# EAGLE board hades_mk1_esc_board (EAGLE 9.6.2)
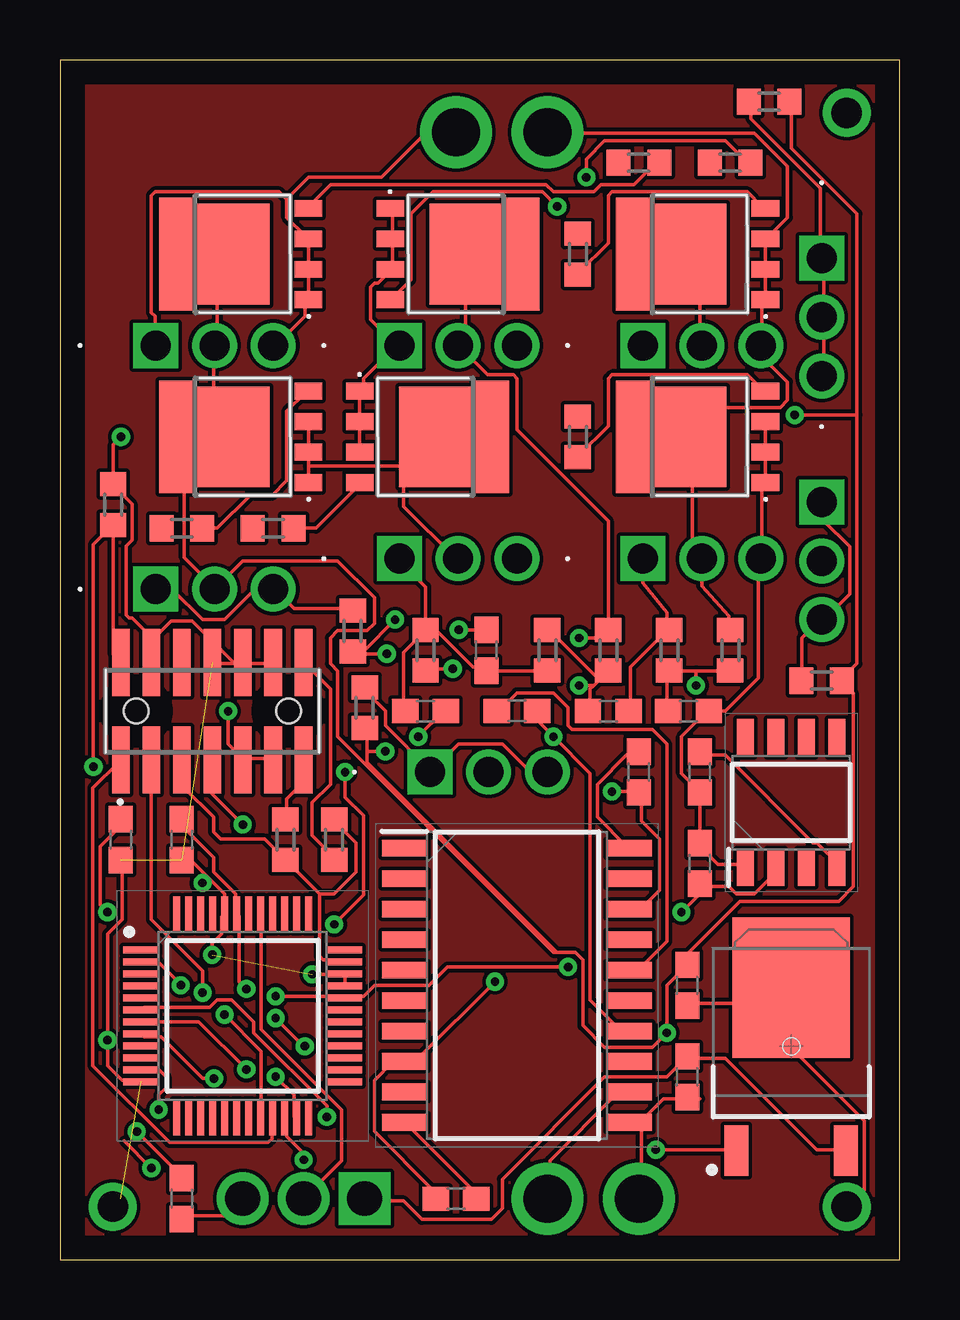
[diagram p0: board, top side]
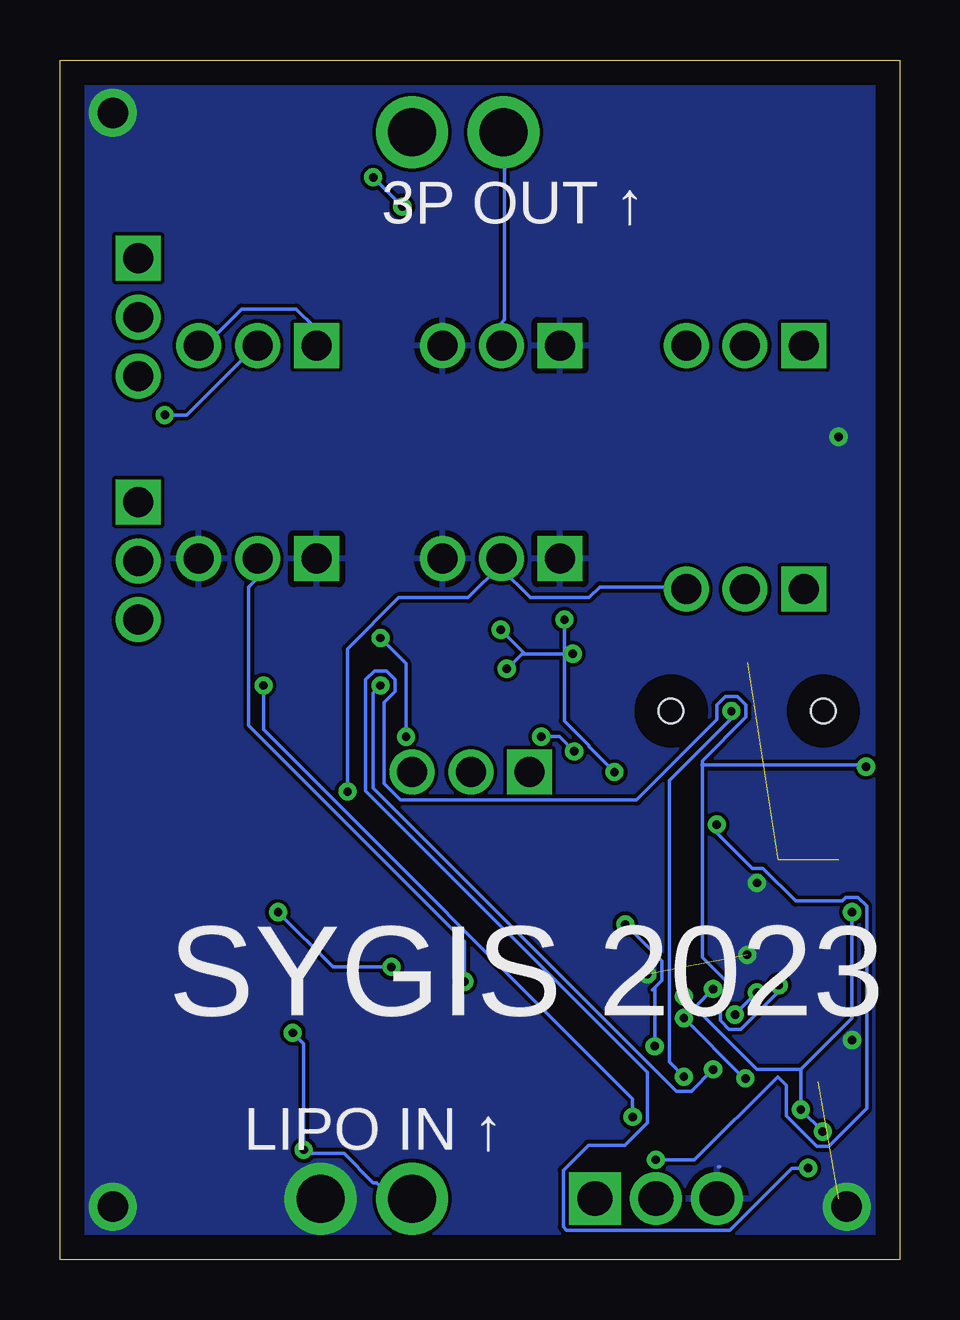
[diagram p1: board, bottom side, seen from below]

Size 35 x 50 mm. Coordinates in mm from the lower left corner, seen from the top.
Outline: 0,0 35,0 35,50 0,50 0,0
Copper layers (1*16): Top 0.035mm / dielectric 1.5mm / Bottom 0.035mm
Design rules "default": minimum track width 6mil, minimum drill 0.35mm, track to track 6mil, track to pad 6mil, pad to pad 6mil, via to via 6mil, smd to smd 6mil, copper to edge 40mil, drill to drill 6mil, minimum pad ring 10mil, minimum via ring 8mil, stop-mask expansion 4mil, vias tented up to drill 0mil, thermal gap 10mil
tKeepout: area 0,0 to 0.4,50; area 0,0 to 35,0.5; area 34.5,0 to 35,50; area 0,49.5 to 35,50
bKeepout: area 0,0 to 0.4,50; area 0,0 to 35,0.5; area 34.5,0 to 35,50; area 0,49.5 to 35,50

## Footprints (pad centres in the part's own frame; a part is rotated, then mirrored left to right if it is on the bottom)
HTR20L120CT = drill 1.25 pad 1.875 square: 1 0,0 | drill 1.25 pad 1.875: 2 4.9,0; 3 2.45,0
C0603 = smd 1.1 x 1: 1 -0.85,0; 2 0.85,0
QFP50P900X900X160-48N = smd 1.475 x 0.3: 1 -4.238,2.75; 2 -4.238,2.25; 3 -4.238,1.75; 4 -4.238,1.25; 5 -4.238,0.75; 6 -4.238,0.25; 7 -4.238,-0.25; 8 -4.238,-0.75; 9 -4.238,-1.25; 10 -4.238,-1.75; 11 -4.238,-2.25; 12 -4.238,-2.75; 25 4.238,-2.75; 26 4.238,-2.25; 27 4.238,-1.75; 28 4.238,-1.25; 29 4.238,-0.75; 30 4.238,-0.25; 31 4.238,0.25; 32 4.238,0.75; 33 4.238,1.25; 34 4.238,1.75; 35 4.238,2.25; 36 4.238,2.75 | smd 0.3 x 1.475: 13 -2.75,-4.238; 14 -2.25,-4.238; 15 -1.75,-4.238; 16 -1.25,-4.238; 17 -0.75,-4.238; 18 -0.25,-4.238; 19 0.25,-4.238; 20 0.75,-4.238; 21 1.25,-4.238; 22 1.75,-4.238; 23 2.25,-4.238; 24 2.75,-4.238; 37 2.75,4.238; 38 2.25,4.238; 39 1.75,4.238; 40 1.25,4.238; 41 0.75,4.238; 42 0.25,4.238; 43 -0.25,4.238; 44 -0.75,4.238; 45 -1.25,4.238; 46 -1.75,4.238; 47 -2.25,4.238; 48 -2.75,4.238
SOIC127P600X175-8N = smd 1.525 x 0.7: 1 -2.712,1.905; 2 -2.712,0.635; 3 -2.712,-0.635; 4 -2.712,-1.905; 5 2.712,-1.905; 6 2.712,-0.635; 7 2.712,0.635; 8 2.712,1.905
TO228P972X240-3N = smd 2.1 x 1: 1 -4.35,2.28; 3 -4.35,-2.28 | smd 5.85 x 4.9: 4 2.45,0
SOIC127P1032X265-20N = smd 1.875 x 0.7: 1 -4.688,5.715; 2 -4.688,4.445; 3 -4.688,3.175; 4 -4.688,1.905; 5 -4.688,0.635; 6 -4.688,-0.635; 7 -4.688,-1.905; 8 -4.688,-3.175; 9 -4.688,-4.445; 10 -4.688,-5.715; 11 4.688,-5.715; 12 4.688,-4.445; 13 4.688,-3.175; 14 4.688,-1.905; 15 4.688,-0.635; 16 4.688,0.635; 17 4.688,1.905; 18 4.688,3.175; 19 4.688,4.445; 20 4.688,5.715
SHDRRA3W87P0X254_1X3_747X818X6 = drill 1.45 pad 2.175 square: 1 0,0 | drill 1.45 pad 2.175: 2 2.54,0; 3 5.08,0
FTSH-107-XX-YYY-DV-K-A = smd 0.74 x 2.79: 1 -3.81,-2.035; 2 -3.81,2.035; 3 -2.54,-2.035; 4 -2.54,2.035; 5 -1.27,-2.035; 6 -1.27,2.035; 7 0,-2.035; 8 0,2.035; 9 1.27,-2.035; 10 1.27,2.035; 11 2.54,-2.035; 12 2.54,2.035; 13 3.81,-2.035; 14 3.81,2.035 | hole 1.02: -3.175,0; 3.175,0
PSMN028100YS115 = smd 0.7 x 1.15: 1 -1.905,-2.737; 2 -0.635,-2.737; 3 0.635,-2.737; 4 1.905,-2.737 | smd 4.2 x 3.1: 5 0,0.437 | smd 4.7 x 1.5: 6 0,2.737
R0603 = smd 1 x 1.1: 1 -0.85,0; 2 0.85,0

## Placement (x,y rotation side)
BR1  HTR20L120CT  [HTR20L120CT]  15.42,20.32 0 top
BR2  HTR20L120CT  [HTR20L120CT]  31.75,31.57 270 top
BR4  HTR20L120CT  [HTR20L120CT]  31.75,41.73 270 top
BR5  HTR20L120CT  [HTR20L120CT]  3.99,27.94 0 top
BR6  HTR20L120CT  [HTR20L120CT]  14.15,29.21 0 top
BR7  HTR20L120CT  [HTR20L120CT]  14.15,38.1 0 top
BR8  HTR20L120CT  [HTR20L120CT]  3.99,38.1 0 top
BR9  HTR20L120CT  [HTR20L120CT]  24.31,38.1 0 top
BR10  HTR20L120CT  [HTR20L120CT]  24.31,29.21 0 top
C1  10uF  [C0603]  26.67,20.32 90 top
C2  10uF  [C0603]  26.67,16.51 90 top
C3  2.2uF  [C0603]  2.54,17.5 270 top
C4  2.2uF  [C0603]  5.08,17.5 270 top
C5  2.2uF  [C0603]  5.08,2.54 270 top
C6  0.1uF  [C0603]  24.13,20.32 90 top
C7  0.1uF  [C0603]  19.05,22.86 0 top
C8  0.1uF  [C0603]  16.51,2.54 0 top
C9  100uF  [C0603]  17.78,25.4 90 top
C10  100uF  [C0603]  22.86,22.86 180 top
C11  100uF  [C0603]  26.2,22.86 180 top
C12  0.1uF  [C0603]  26.15,11.43 90 top
C13  22uF  [C0603]  26.15,7.62 90 top
C14  0.1uF  [C0603]  15.24,22.86 180 top
IC1  TMS320F28027PTS  [QFP50P900X900X160-48N]  7.62,10.16 0 top
IC2  MC33269D-3.3G  [SOIC127P600X175-8N]  30.48,19.05 90 top
IC3  L4941BDT-TR  [TO228P972X240-3N]  30.48,8.89 90 top
IC4  FAN7388MX  [SOIC127P1032X265-20N]  19.05,11.43 0 top
J1  22-05-3031  [SHDRRA3W87P0X254_1X3_747X818X6]  12.7,2.54 180 top
J2  FTSH-107-01-L-DV-K-A  [FTSH-107-XX-YYY-DV-K-A]  6.35,22.86 0 top
Q1  PSMN038-100YLX  [PSMN028100YS115]  7.62,34.29 90 top
Q2  PSMN038-100YLX  [PSMN028100YS115]  15.24,34.29 270 top
Q3  PSMN038-100YLX  [PSMN028100YS115]  7.62,41.91 90 top
Q4  PSMN038-100YLX  [PSMN028100YS115]  16.51,41.91 270 top
Q5  PSMN038-100YLX  [PSMN028100YS115]  26.67,41.91 90 top
Q6  PSMN038-100YLX  [PSMN028100YS115]  26.67,34.29 90 top
R1  2.2  [R0603]  5.08,30.48 180 top
R2  2.2  [R0603]  8.89,30.48 180 top
R3  2.2  [R0603]  24.13,45.72 180 top
R4  2.2  [R0603]  27.94,45.72 180 top
R5  2.2  [R0603]  21.59,41.91 90 top
R6  2.2  [R0603]  21.59,34.29 90 top
R7  2.2  [R0603]  12.7,23 90 top
R8  2.2  [R0603]  31.75,24.13 180 top
R9  2.2  [R0603]  29.56,48.26 180 top
R13  100k  [R0603]  15.24,25.4 270 top
R14  330k  [R0603]  12.2,26.2 90 top
R15  100k  [R0603]  20.32,25.4 90 top
R16  330k  [R0603]  22.86,25.4 90 top
R17  100k  [R0603]  25.4,25.4 270 top
R18  330k  [R0603]  27.94,25.4 90 top
R19  2.2k  [R0603]  2.22,31.47 270 top
R20  4.7k  [R0603]  9.4,17.5 90 top
R21  4.7k  [R0603]  11.43,17.5 270 top

## Library data of the parts
BR1 BR2 BR4-BR10 = SamacSys_Parts; DESCRIPTION: SCHOTTKY RECT, DUAL, 120V, 20A, TO-220AB; HEIGHT: 20mm; MANUFACTURER_NAME: MULTICOMP; MANUFACTURER_PART_NUMBER: HTR20L120CT
C1-C14 = rcl; SPICEPREFIX: C
IC1 = SamacSys_Parts; ARROW_PART_NUMBER: TMS320F28027PTS; ARROW_PRICE-STOCK: https://www.arrow.com/en/products/tms320f28027pts/texas-instruments?region=nac; DESCRIPTION: Piccolo 32-bit MCU with 60 MHz, 64 KB Flash; HEIGHT: 1.6mm; MANUFACTURER_NAME: Texas Instruments; MANUFACTURER_PART_NUMBER: TMS320F28027PTS; MOUSER_PART_NUMBER: 595-TMS320F28027PTS; MOUSER_PRICE-STOCK: https://www.mouser.co.uk/ProductDetail/Texas-Instruments/TMS320F28027PTS?qs=AFkNxQkJKAJP3ZJleH7SMA%3D%3D
IC2 = SamacSys_Parts; ARROW_PART_NUMBER: MC33269D-3.3G; ARROW_PRICE-STOCK: https://www.arrow.com/en/products/mc33269d-3.3g/on-semiconductor?region=europe; DESCRIPTION: Voltage regulator,MC33269D3.3 MC33269D-3.3G, Low Dropout Voltage Regulator, 0.8A 3.3 V, +/-1%, 8-Pin, SOIC; HEIGHT: 1.75mm; MANUFACTURER_NAME: onsemi; MANUFACTURER_PART_NUMBER: MC33269D-3.3G; MOUSER_PART_NUMBER: 863-MC33269D-3.3G; MOUSER_PRICE-STOCK: https://www.mouser.co.uk/ProductDetail/onsemi/MC33269D-33G?qs=dFKnUM%2FquJZ%252BBcrN2hd5Yg%3D%3D
IC3 = SamacSys_Parts; ARROW_PART_NUMBER: L4941BDT-TR; ARROW_PRICE-STOCK: https://www.arrow.com/en/products/l4941bdt-tr/stmicroelectronics?region=nac; DESCRIPTION: L4941BDT-TR, Low Dropout Voltage Regulator, 1A, 5 V +/-4%, 3-Pin DPAK; HEIGHT: 2.4mm; MANUFACTURER_NAME: STMicroelectronics; MANUFACTURER_PART_NUMBER: L4941BDT-TR; MOUSER_PART_NUMBER: 511-L4941BDT-TR; MOUSER_PRICE-STOCK: https://www.mouser.co.uk/ProductDetail/STMicroelectronics/L4941BDT-TR?qs=tPFdqECvbMIySYN92F2N4Q%3D%3D
IC4 = SamacSys_Parts; ARROW_PART_NUMBER: FAN7388MX; ARROW_PRICE-STOCK: https://www.arrow.com/en/products/fan7388mx/on-semiconductor; DESCRIPTION: IC, Fairchild, FAN7388MX Fairchild Semiconductor FAN7388MX, Triple MOSFET Power Driver 350 mA, 650 mA Half Bridge, 10 20 V, Inverting; HEIGHT: 2.65mm; MANUFACTURER_NAME: onsemi; MANUFACTURER_PART_NUMBER: FAN7388MX; MOUSER_PART_NUMBER: 512-FAN7388MX; MOUSER_PRICE-STOCK: https://www.mouser.com/Search/Refine.aspx?Keyword=512-FAN7388MX
J1 = SamacSys_Parts; DESCRIPTION: 2.54mm,header,KK,90,Sn,frictn lock,3w Molex KK 254 Series, Series Number 7478, 2.54mm Pitch 3 Way 1 Row Right Angle PCB Header, Through Hole; HEIGHT: 6.6mm; MANUFACTURER_NAME: Molex; MANUFACTURER_PART_NUMBER: 22-05-3031; MOUSER_PART_NUMBER: 538-22-05-3031; MOUSER_PRICE-STOCK: https://www.mouser.co.uk/ProductDetail/Molex/22-05-3031?qs=wUVoC1r15A8R6yfh%252BPzUyQ%3D%3D
J2 = SamacSys_Parts; ARROW_PART_NUMBER: FTSH-107-01-L-DV-K-A; ARROW_PRICE-STOCK: https://www.arrow.com/en/products/ftsh-107-01-l-dv-k-a/samtec?region=nac; DESCRIPTION: 14 position, High Reliability Header Strips, 0.050&quot; pitch, Dual-Row Vertical; HEIGHT: mm; MANUFACTURER_NAME: SAMTEC; MANUFACTURER_PART_NUMBER: FTSH-107-01-L-DV-K-A; MOUSER_PART_NUMBER: 200-FTSH10701LDVKA; MOUSER_PRICE-STOCK: https://www.mouser.co.uk/ProductDetail/Samtec/FTSH-107-01-L-DV-K-A?qs=PB6%2FjmICvI3xEHFou4PhNg%3D%3D
Q1-Q6 = SamacSys_Parts; ARROW_PART_NUMBER: PSMN038-100YLX; ARROW_PRICE-STOCK: https://www.arrow.com/en/products/psmn038-100ylx/nexperia?region=nac; DESCRIPTION: MOSFET N-channel 100 V 37.5 mo FET; HEIGHT: 1.2mm; MANUFACTURER_NAME: Nexperia; MANUFACTURER_PART_NUMBER: PSMN038-100YLX; MOUSER_PART_NUMBER: 771-PSMN038100YLX; MOUSER_PRICE-STOCK: https://www.mouser.co.uk/ProductDetail/Nexperia/PSMN038-100YLX?qs=fi7yB2oewZmlCDCybeIKqQ%3D%3D
R1-R9 R13-R21 = rcl; SPICEPREFIX: R

## Nets
5V_OUT: C13.2 IC3.3 J1.1
+3V3: C2.1 C3.1 C4.1 C5.1 IC1.11 IC1.32 IC1.43 IC2.2
EMF_1: C9.2 IC1.8 R13.2 R14.1
EMF_2: C10.2 IC1.7 R15.2 R16.1
EMF_3: C11.2 IC1.6 R17.2 R18.1
G_1: IC4.19
G_2: IC4.17
G_3: IC4.15
G_4: IC4.13
G_5: IC4.9
G_6: IC4.7
GND: BR6.1 BR6.2 BR7.1 BR7.2 BR10.1 BR10.2 C1.1 C2.2 C3.2 C4.2 C5.2 C9.1 C10.1 C11.1 C12.1 C13.1 C14.2 IC1.12 IC1.33 IC1.34 IC1.44 IC2.1 IC3.4 IC4.11 J1.3 J2.4 J2.8 J2.10 J2.12 Q2.1 Q2.2 Q2.3 Q4.1 Q4.2 Q4.3 Q6.1 Q6.2 Q6.3 R13.1 R15.1 R17.1 R19.1
N$1: J2.14 R21.2
N$2: C1.2 IC2.4
N$3: J2.13 R20.2
N$4: IC4.1
N$5: IC4.2
N$6: IC4.3
N$7: IC4.4
N$8: IC4.5
N$9: IC4.6
N$10: Q1.4 R1.1
N$11: Q2.4 R2.1
N$12: Q3.4 R3.1
N$13: Q4.4 R4.1
N$14: Q5.4 R5.1
N$15: Q6.4 R6.1
N$16: R1.2
N$17: R2.2
N$18: R3.2
N$19: R4.2
N$20: R5.2
N$21: R6.2
N$28: BR2.1 BR2.2 R8.2
N$29: BR2.3
N$30: BR4.1 BR4.2 BR4.3 R9.2
N$32: BR1.1 BR1.2 R7.2
N$33: BR1.3
PH_1: IC1.29
PH_2: IC1.37
PH_3: IC1.39
PL_1: IC1.28
PL_2: IC1.38
PL_3: IC1.40
SIG_IN: IC1.41 J1.2
TCK: IC1.23 J2.9 J2.11
TDI: IC1.20 J2.3
TDO: IC1.22 J2.7
TMS: IC1.21 J2.1
TRST: IC1.2 J2.2 R19.2
VCC: BR5.3 BR8.3 BR9.3 C12.2 C14.1 IC3.1 IC4.12 Q1.5 Q1.6 Q3.5 Q3.6 Q5.5 Q5.6 R7.1 R8.1 R9.1
VCC_C1: C6.2 IC4.20
VCC_C2: C7.1 IC4.16
VCC_C3: C8.2 IC4.10
VDDIO_S: IC1.35 J2.5 R20.1 R21.1
VS1: BR5.1 BR5.2 BR6.3 C6.1 IC4.18 Q1.1 Q1.2 Q1.3 Q2.5 Q2.6 R14.2
VS2: BR7.3 BR8.1 BR8.2 C7.2 IC4.14 Q3.1 Q3.2 Q3.3 Q4.5 Q4.6 R16.2
VS3: BR9.1 BR9.2 BR10.3 C8.1 IC4.8 Q5.1 Q5.2 Q5.3 Q6.5 Q6.6 R18.2

## Tracks (layer width: path | path; a pad name or v marks a point on that pad's centre or on a via)
5V_OUT
  Top 0.152: IC3.3 32.61,4.57 31.55,4.57 27.74,8.38 26.21,8.38 C13.2 26.06,8.38 25.3,7.62 22.71,7.62 18.44,3.35 18.44,2.13 17.98,1.68 15.09,1.68 14.33,2.44 12.8,2.44 J1.1
+3.3V
  pour Top: 0,49.53 0,0 35,0 35,50 0,50
+3V3  (via drill 0.35)
  Top 0.152: C4.1 5.18,18.29 5.18,17.98 6.4,16.76 6.4,16.15 7.32,15.24 7.32,14.48 IC1.43 7.47,14.33 7.47,11.58 v7.77,11.28 | 26.67,15.54 27.89,15.54 28.19,15.24 28.96,15.24 29.72,16 29.72,16.31 IC2.2 | v3.2,5.33 5.03,3.5 C5.1 | v4.12,6.25 4.12,6.86 4.42,7.16 4.42,7.62 4.12,7.92 3.5,7.92 IC1.11 | v1.98,14.48 1.68,14.78 1.68,17.22 2.44,17.98 2.44,18.29 C3.1 | v8.99,10.97 11.73,10.97 IC1.32 11.89,10.97 12.65,10.97 13.11,11.43 15.39,11.43 16.15,12.19 v21.18,12.19 | 26.67,15.54 26.67,15.24 v25.91,14.48 | 26.67,15.54 C2.1
  Bottom 0.152: v3.2,5.33 v4.12,6.25 4.12,7.92 | v1.98,14.48 1.98,10.06 4.12,7.92 | 8.53,10.52 5.94,7.92 4.12,7.92 | 8.53,10.52 v8.99,10.97 | v25.91,14.48 23.62,12.19 v21.18,12.19 | 8.53,10.52 v7.77,11.28
EMF_1  (via drill 0.35)
  Top 0.152: v13.62,25.25 12.25,25.25 R14.1 | v16.38,24.62 15.25,24.62 R13.2 | v16.62,26.25 C9.2 | R14.1 12.16,25.35 12.11,25.31 | R14.1 12.65,25.35 v13.97,26.67 | v11.88,20.32 11.88,19.27 12.65,18.5 12.65,15.19 v11.43,13.97 | v10.21,8.89 10.16,8.89 8.89,10.16 v8.99,10.06 | IC1.8 3.5,9.29 4.21,9.29 5.96,7.55 v6.42,7.55
  Bottom 0.152: 15.62,25.25 15.75,25.25 v16.38,24.62 | 15.62,25.25 v13.62,25.25 | 15.62,25.25 v16.62,26.25 | v11.88,20.32 12.96,21.39 12.96,21.43 13.97,22.45 v13.97,26.67 | v11.43,13.97 9.91,12.45 9.91,11.64 10.14,11.41 10.21,11.34 | 10.3,11.24 10.21,11.34 | 10.21,11.34 v10.21,8.89 | v8.99,10.06 6.54,7.62 6.35,7.62 v6.42,7.55
EMF_2  (via drill 0.35)
  Top 0.152: 22.55,24.23 22.86,24.54 R16.1 22.55,24.23 | 22.55,24.23 22.25,23.93 | 22.25,23.93 22.1,23.77 22.1,22.86 C10.2 | 22.55,24.23 22.4,24.23 20.42,26.21 R15.2 | v7.77,7.92 5.79,9.91 3.5,9.91 IC1.7 | 22.25,23.93 v21.64,23.93
  Bottom 0.152: v7.77,7.92 8.69,7.01 9.3,7.01 21.95,19.66 21.95,23.62 v21.64,23.93
EMF_3  (via drill 0.35)
  Top 0.152: C11.2 25.3,22.86 25.3,24.54 R17.2 25.45,24.54 26.52,24.54 | 26.52,24.54 27.89,24.54 R18.1 | v11.12,5.94 11.12,6.4 8.08,9.45 8.08,9.91 7.16,10.82 6.55,10.82 6.25,10.52 3.5,10.52 IC1.6 | 26.52,24.54 v26.52,23.93
  Bottom 0.152: v11.12,5.94 11.12,6.71 26.52,22.1 v26.52,23.93
GND  (via drill 0.35, 1.27 pad 2, 2 pad 3)  (4 unrouted)
  Top 0.152: IC1.33 11.89,11.43 11.89,11.89 IC1.34 11.73,11.89 v10.52,11.89 | R15.1 20.27,24.54 17.83,24.54 C9.1 17.68,24.69 17.22,24.69 15.7,26.21 15.24,26.21 | 15.24,26.21 14.33,25.3 14.33,22.86 C14.2 | 15.24,26.21 R13.1 15.24,28.04 14.17,29.11 BR6.1 | 24.23,5.79 23.77,5.79 IC4.11 24.23,5.79 | 26.67,6.71 C13.1 26.06,6.71 25.15,6.71 24.23,5.79 | BR10.1 24.31,28.19 25.3,26.98 25.3,26.36 R17.1 25.3,26.21 23.77,24.69 23.77,22.86 C10.1 | 29.87,10.67 26.21,10.67 C12.1 | 29.87,10.67 30.48,11.28 IC3.4 29.87,10.67 | C3.2 2.59,16.61 2.59,14.17 1.98,13.56 v1.98,9.14 1.98,8.08 2.59,7.47 3.35,7.47 IC1.12 | 7.25,24.84 6.4,24.84 J2.8 | 7.25,24.84 7.62,24.84 | 7.62,24.84 8.84,24.84 J2.12 | 7.62,24.84 J2.10 | IC2.1 28.5,16.46 27.43,16.46 26.67,17.22 C2.2 C1.1 26.67,19.51 25.91,20.27 25.91,21.79 26.98,22.86 C11.1 27.74,22.86 29.11,24.23 29.11,29.11 BR10.2 29.26,29.26 29.26,32.31 Q6.1 29.41,32.46 29.41,33.53 Q6.2 29.41,33.68 29.41,34.9 Q6.3 | 6.1,16 6.86,15.24 6.86,14.48 IC1.44 6.75,14.28 6.75,13.57 6.35,13.17 v6.35,12.7 | 6.1,16 5.49,16.61 5.18,16.61 C4.2 | Q4.1 13.87,43.74 13.87,42.67 Q4.2 13.87,42.52 13.87,41.3 Q4.3 13.72,41.15 13.26,40.69 13.11,40.69 12.95,40.54 12.95,39.17 14.02,38.1 | Q2.3 12.5,33.68 12.5,34.9 Q2.2 12.5,35.05 12.5,36.12 Q2.1 12.65,36.27 12.65,36.73 14.02,38.1 | C5.2 5.18,1.83 7.01,1.83 7.62,2.44 J1.3 | 24.23,5.79 24.23,2.59 v24.13,2.54 | 14.02,38.1 BR7.1 | 6.1,16 6.1,15.85 v5.94,15.7 | 29.87,10.67 29.87,9.45 33.53,5.79 33.53,2.9 32.92,2.29 v32.8,2.2 | v2.54,34.29 2.22,33.97 R19.1 2.25,32.25 3,31.5 3,30 2.75,29.75 2.75,26.88 2.88,26.75 3,26.75 3.88,25.88 | 3.88,25.88 3.88,25 J2.4 3.88,25.88
  Top 0.152: 3.88,25.88 4.62,26.62 5.5,26.62 7.25,24.88 7.25,24.84
  Bottom 0.152: 2.54,2.54 v2.2,2.2 | 7.5,3.88 7.54,3.88
  other vias: 32.8,47.8
  pour Bottom: 0,49.53 0,0 35,0 35,50 0,50
N$1
  Top 0.152: R21.2 11.43,16.76 10.52,17.68 10.52,19.05 11.28,19.81 11.28,23.77 10.21,24.84 J2.14
N$2
  Top 0.152: C1.2 26.67,21.03 27.74,21.03 31.39,17.37 31.55,17.37 32.46,16.46 IC2.4
N$3
  Top 0.152: R20.2 9.45,18.44 9.45,19.2 10.06,19.81 10.06,20.73 J2.13
N$10
  Top 0.152: R1.1 6.55,30.48 7.92,31.85 8.84,31.85 9.45,32.46 9.45,35.36 10.21,36.12 Q1.4
N$11
  Top 0.152: R2.1 10.67,30.48 12.5,32.31 Q2.4
N$12
  Top 0.152: R3.1 24.84,45.72 23.93,44.81 22.55,44.81 22.25,44.5 20.57,44.5 20.27,44.81 11.28,44.81 10.36,43.89 Q3.4
N$13  (via drill 0.35)
  Top 0.152: v21.95,45.11 21.95,45.87 22.71,46.63 27.74,46.63 28.65,45.72 R4.1 | v20.73,43.89 20.12,44.5 15.54,44.5 14.63,43.59 14.63,40.84 13.87,40.08 Q4.4
  Bottom 0.152: v20.73,43.89 v21.95,45.11
N$14
  Top 0.152: R5.1 21.64,41.15 22.86,42.37 22.86,44.35 23.01,44.5 28.65,44.5 29.26,43.89 Q5.4
N$15
  Top 0.152: R6.1 21.64,33.53 22.86,34.75 22.86,36.73 23.01,36.88 28.65,36.88 29.26,36.27 Q6.4
N$28
  Top 0.152: R8.2 30.94,24.23 30.94,25.91 31.7,26.67 BR2.2 31.85,26.67 32.92,27.74 32.92,29.72 31.85,30.79 31.85,31.55 BR2.1
N$30
  Top 0.152: BR4.2 31.85,36.88 31.85,39.17 BR4.3 31.85,39.32 31.85,41.6 BR4.1 31.7,41.76 31.7,44.65 28.8,47.55 28.8,48.16 R9.2
N$32
  Top 0.152: BR1.2 20.27,20.42 19.51,20.42 18.44,21.49 16.61,21.49 15.54,20.42 BR1.1 15.39,20.42 13.56,22.25 13.56,22.86 12.8,23.62 12.8,23.77 R7.2
SIG_IN
  Top 0.152: J1.2 11.73,4.12 11.73,6.25 8.38,9.6 8.38,14.33 IC1.41
TCK  (via drill 0.35)
  Top 0.152: 7.62,20.88 8.84,20.88 J2.11 | v8.99,7.62 9.75,6.86 9.75,5.94 IC1.23 | v7.01,22.86 7.01,21.49 7.62,20.88 | 7.62,20.88 J2.9
  Bottom 0.152: v8.99,7.62 9.6,8.23 9.6,19.96 7.01,22.55 v7.01,22.86
TDI  (via drill 0.35)
  Top 0.152: v6.86,10.21 8.38,8.69 8.38,5.94 IC1.20 | v5.94,11.12 5.94,12.04 3.81,14.17 J2.3
  Bottom 0.152: v5.94,11.12 v6.86,10.21
TDO  (via drill 0.35)
  Top 0.152: IC1.22 9.45,5.84 9.45,5.13 10.16,4.42 v10.16,4.16 | v7.62,18.13 6.35,19.4 J2.7
  Bottom 0.152: v10.16,4.16 8.54,4.16 5.08,7.62 4.72,7.26 4.72,6 3.45,4.73 2.95,4.73 1.37,6.3 1.37,14.73 1.73,15.09 2.23,15.09 2.38,14.94 4.33,14.94 5.69,16.3 6.14,16.3 7.62,17.78 v7.62,18.13
TMS
  Top 0.152: IC1.21 8.84,5.79 8.84,5.03 8.69,4.88 4.57,4.88 1.37,8.08 1.37,19.66 2.44,20.73 J2.1
TRST  (via drill 0.35)
  Top 0.152: IC1.2 4.1,12.41 5.08,11.43 v5.04,11.43 | v3.81,3.81 2.68,4.94 | J2.2 2.22,25.21 R19.2 1.39,29.79 v1.39,20.54
  Bottom 0.152: 8.23,20.62 8.23,12.59 7.17,11.53 7.17,11.03 7.46,10.73 7.46,9.96 7.11,9.6 6.61,9.6 5.04,11.18 v5.04,11.43 | 8.23,20.62 8.23,20.79 6.4,22.61 6.4,23.11 6.76,23.47 7.26,23.47 7.62,23.11 7.62,22.5 10.96,19.15 20.8,19.15 21.49,19.84 21.49,23.22 21.03,23.68 21.03,24.18 21.39,24.53 21.89,24.53 22.25,24.18 22.25,19.53 10.52,7.8 10.52,5.69 11.45,4.76 12.97,4.76 14.02,3.72 14.02,1.36 13.88,1.22 7.08,1.22 4.49,3.81 v3.81,3.81 | 8.23,20.62 1.5,20.62 v1.39,20.54 | 8.25,20.62 8.23,20.62
VCC  (via drill 0.35, 2 pad 3)
  Top 0.152: 23.16,6.86 23.62,6.86 IC4.12 23.16,6.86 | 5.18,34.29 6.4,34.29 | 6.55,41.3 6.55,38.1 BR8.3 6.4,38.1 6.4,34.29 | 6.55,41.3 7.16,41.91 Q3.5 6.55,41.3 | Q3.6 5.94,41.91 6.55,41.3 | 5.18,33.83 5.18,29.26 6.4,28.04 BR5.3 6.55,28.04 7.62,29.11 11.58,29.11 13.11,27.58 13.11,26.52 12.8,26.21 11.58,26.21 11.28,25.91 11.28,24.84 11.58,24.54 11.58,21.79 20.57,12.8 20.73,12.8 | 5.18,33.83 5.18,34.29 | 5.18,34.29 Q1.6 5.18,33.83 | BR9.3 26.67,38.1 26.67,41.6 26.36,41.91 Q5.5 Q5.6 | 23.16,6.86 20.42,4.12 20.42,2.59 v20.32,2.54 | v24.84,4.57 28.19,4.57 IC3.1 | 20.73,12.8 21.49,12.8 21.79,12.5 21.79,9.75 22.71,8.84 24.69,8.84 v25.3,9.45 25.3,11.43 26.06,12.19 C12.2 26.21,12.34 26.21,12.8 28.35,14.94 32.46,14.94 33.07,15.54 33.07,23.62 32.61,24.08 R8.1 32.61,24.23 33.22,24.84 33.22,35.2 | 12.8,21.18 12.8,20.73 20.73,12.8 | 12.8,21.18 12.8,22.1 R7.1 | v14.94,21.79 16,22.86 C14.1 | 12.8,21.18 v13.56,21.18 | 5.18,33.83 6.71,33.83 7.16,34.29 Q1.5 6.4,34.29 | 33.22,35.2 33.22,43.59 30.48,46.33 30.48,48.16 R9.1 | 33.22,35.2 v30.63,35.2
  Bottom 0.152: v20.32,2.54 20.42,2.59 21.18,2.59 21.79,3.2 21.95,3.2 23.16,4.42 24.69,4.42 v24.84,4.57 24.84,8.99 v25.3,9.45 | v14.94,21.79 14.17,21.79 v13.56,21.18 | v30.63,35.2 29.72,35.2 26.82,38.1 BR9.3
VCC_C1
  Top 0.152: C6.2 24.08,21.03 23.62,21.03 22.4,19.81 22.4,18.44 23.62,17.22 IC4.20
VCC_C2
  Top 0.152: C7.1 18.29,22.86 19.05,23.62 20.57,23.62 21.18,23.01 21.18,22.25 21.34,22.1 24.69,22.1 25.3,21.49 25.3,13.26 24.23,12.19 23.77,12.19 IC4.16
VCC_C3
  Top 0.152: C8.2 17.22,2.59 17.22,2.9 14.48,5.64 IC4.10
VDDIO_S
  Top 0.152: 10.82,15.24 9.45,16.61 R20.1 9.3,16.76 8.53,17.53 6.71,17.53 6.4,17.83 6.4,18.44 5.18,19.66 5.18,20.73 J2.5 | 10.82,15.24 10.82,12.65 10.97,12.5 11.73,12.5 IC1.35 | 10.82,15.24 11.43,15.24 12.34,16.15 12.34,17.37 11.43,18.29 R21.1
VS1  (via drill 0.35)
  Top 0.152: Q2.5 Q2.6 | BR5.1 4.12,27.89 4.72,27.89 5.94,26.67 6.86,26.67 8.08,27.89 8.84,27.89 BR5.2 8.99,27.89 9.75,27.13 12.19,27.13 R14.2 | 10.36,33.07 10.36,33.53 Q1.2 10.36,33.68 10.36,34.9 Q1.3 | 10.36,33.07 10.36,32.46 Q1.1 | 14.33,33.07 10.36,33.07 | 14.33,33.07 15.54,34.29 Q2.5 | IC4.18 23.77,14.63 24.23,14.63 24.99,15.39 24.99,17.53 24.23,18.29 24.23,19.36 C6.1 24.08,19.51 v23.01,19.51 | 14.33,33.07 14.33,31.39 16.46,29.26 BR6.3 | 14.33,33.07 Q2.5
  Bottom 0.152: v23.01,19.51 23.01,25.45 20.88,27.58 17.98,27.58 16.61,28.96 | 16.61,28.96 16.46,29.11 BR6.3 16.61,28.96 | 16.61,28.96 16.61,28.8 15.39,27.58 12.95,27.58 12.5,28.04 8.99,28.04 BR5.2
VS2  (via drill 0.35, 2 pad 3)
  Top 0.152: Q4.6 Q4.5 16.92,41.91 16.92,38.41 16.61,38.1 | BR8.2 8.99,38.1 10.21,39.32 10.21,39.93 Q3.1 10.36,40.08 10.36,41.15 Q3.2 10.36,41.3 10.36,42.52 Q3.3 10.21,42.67 9.45,43.43 9.45,44.2 | 9.45,44.2 10.36,45.11 13.41,45.11 15.24,46.94 16.46,46.94 v16.51,46.99 | 9.45,44.2 9.14,44.5 3.96,44.5 3.81,44.35 3.81,39.47 3.96,39.32 3.96,38.1 BR8.1 | C7.2 19.96,22.86 19.96,22.4 v20.57,21.79 22.1,20.27 22.1,10.82 23.32,9.6 23.62,9.6 IC4.14 | 16.61,38.1 17.83,36.88 18.9,36.88 19.05,36.73 19.05,34.59 22.86,30.79 R16.2 22.86,26.21 22.55,25.91 v21.64,25.91 | 16.61,38.1 BR7.3
  Bottom 0.152: v20.57,21.79 20.57,24.84 v21.64,25.91 | v16.51,46.99 16.46,46.94 16.46,39.17 16.61,39.01 16.61,38.1 BR7.3
VS3  (via drill 0.35, 2 pad 3)
  Top 0.152: Q6.6 Q6.5 26.36,34.29 | R18.2 27.89,26.36 27.89,26.82 26.76,28.08 BR10.3 26.67,29.26 26.36,29.57 26.36,34.29 | 29.41,42.52 29.41,41.3 Q5.2 29.41,41.15 29.41,40.08 Q5.1 29.26,39.93 29.26,38.1 | 29.41,42.52 30.33,43.43 30.33,45.57 28.96,46.94 20.42,46.94 v20.32,46.99 | 29.41,42.52 Q5.3 | C8.1 15.54,2.59 15.54,2.9 13.11,5.33 13.11,7.47 13.87,8.23 14.33,8.23 IC4.8 14.48,8.38 14.94,8.38 v18.14,11.58 | 29.26,38.1 29.26,37.64 30.33,36.58 30.33,35.81 30.02,35.51 27.58,35.51 26.36,34.29 | 29.26,38.1 BR9.2
  Bottom 0.152: BR9.2 28.96,38.1 27.43,39.62 25.15,39.62 24.38,38.86 24.38,38.1 BR9.1 | v18.14,11.58 18.14,13.26 27.13,22.25 27.13,28.04 26.82,28.35 26.82,29.11 BR10.3

## Text on the board
bNames: 3P OUT ↑ | SYGIS 2023 | LIPO IN ↑